# Altium PCB Bat_Indicator.PcbDoc
Units mil, origin at the board's own origin, x right, y up, seen from the top; angles counter-clockwise.
Board outline 1220.47 x 787.4 mil, 2 copper layers (Top Layer, Bottom Layer), stack 61.855 mil thick; 43 components, 34 nets, 166 pads, 4 vias.
Unrouted connection lines stored in the file: 56.
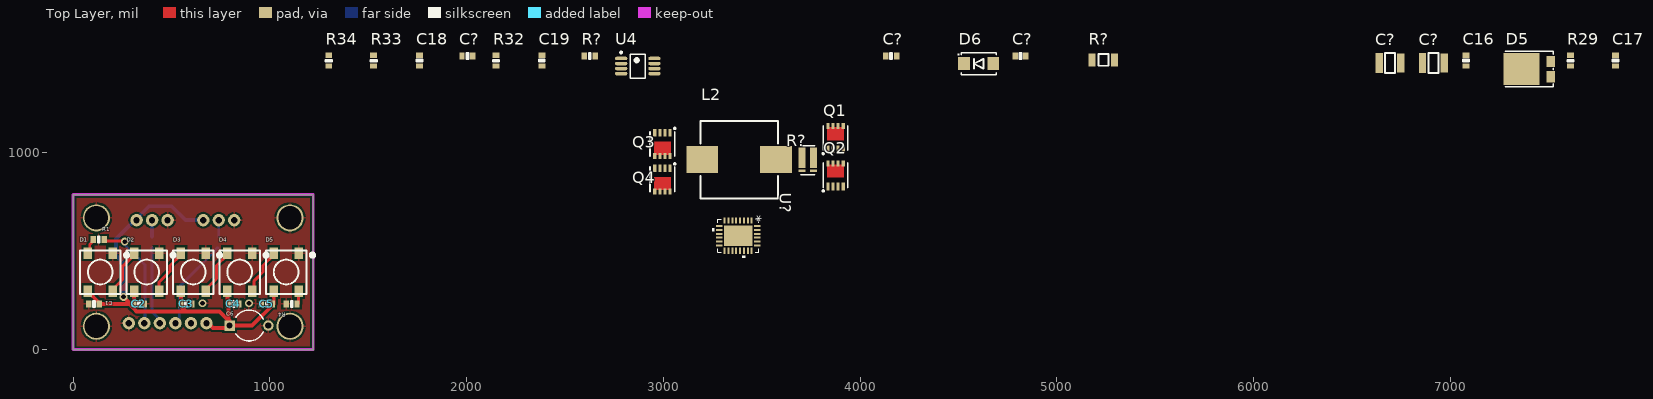
[diagram p0: Top Layer view]
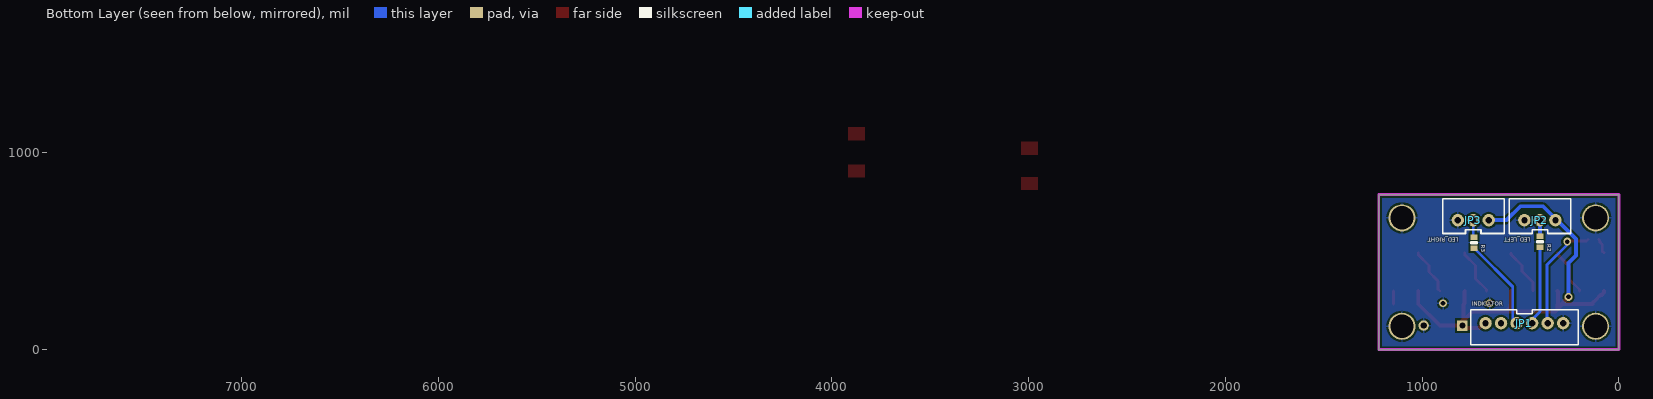
[diagram p1: Bottom Layer view, seen from below]

## Layer stack, top to bottom
Top Solder: solder mask 0.4, Solder Resist, Dk 3.5
Top Layer: signal copper 1.4
Dielectric 1: dielectric 59.0551, FR-4, Dk 4.8
Bottom Layer: signal copper 1.4
Bottom Solder: solder mask 0.4, Solder Resist, Dk 3.5

## Board outline
0,0 0,787.4 1220.47,787.4 1220.47,0

## Design rules (kind name [scope] priority, off if disabled: settings)
Clearance [All] p1: gap=6 ignorepadtopadclearanceinfootprint=FALSE
PolygonConnect [All] p1: connectstyle=Relief reliefconductorwidth=10 reliefentries=4 polygonreliefangle="90 Angle" airgapwidth=10
RoomDefinition Charging [InComponentClass('Charging')] p1: confinementstyle=ConfineIn formatcopy=TRUE lockcomponents=FALSE outline 1267.71,59.05 7988.17,59.05 7988.17,1625.98 1267.71,1625.98
RoomDefinition BAT_INDICATOR [InComponentClass('BAT_INDICATOR')] p2 off: confinementstyle=ConfineIn formatcopy=TRUE lockcomponents=FALSE outline 8113.54,7.99 11828.54,7.99 11828.54,677.99 8113.54,677.99
RoutingVias [All] p1: holewidth=24 width=40 viastyle="Through Hole" minholewidth=24 minwidth=40 maxholewidth=24 maxwidth=40
SolderMaskExpansion [All] p1: expansion=4 istentingtop=FALSE
Width [All] p1: maxlimit=20 minlimit=10 preferedwidth=15 minimp=50.000000 maximp=50.000000 favimp=50.000000
30 further rules are at their usual default settings.

## Classes and differential pairs
component class Charging: C16 C17 C18 C19 C? D5 D6 L2 Q1 Q2 Q3 R29 R32 R33 R34 R? U4 U?
component class BAT_INDICATOR: C1 C2 C3 C4 C5 C6 D1 D2 D3 D4 D5 JP1 JP2 JP3 R1 R2 R3 R4

## Components (designator, comment, footprint, x,y, rotation, side; value= is the part's Value field where it differs from the comment)
C1 "0.1uF 16V 0603" C0603[1608X92] 106.3,232.28 r0 top value=0.1uF
C2 "0.1uF 16V 0603" C0603[1608X92] 334.65,232.28 r180 top value=0.1uF
C3 "0.1uF 16V 0603" C0603[1608X92] 574.8,232.28 r180 top value=0.1uF
C4 "0.1uF 16V 0603" C0603[1608X92] 814.96,232.28 r180 top value=0.1uF
C5 "0.1uF 16V 0603" C0603[1608X92] 984.25,232.28 r0 top value=0.1uF
C6 "Cap2" CAPR5-4X5 893.7,122.05 r0 top value=100pF
C16 "10uF 16V 0603" C0603[1608X92] 7078.73,1468.5 r90 top value=10uF
C17 "10uF 16V 0603" C0603[1608X92] 7838.57,1468.5 r90 top value=10uF
C18 "0.1uF 6.3V 0603" C0603[1608X92] 1759.84,1468.5 r90 top value=0.1uF
C19 "0.1uF 6.3V 0603" C0603[1608X92] 2381.89,1468.5 r90 top value=0.1uF
C? "10uF 50V X5R +/-20% 1210" C1210[3225X150] 6692.9,1456.69 r0 top value="10 uF"
C? "0.47uF 50V 0603" C0603[1608X92] 4157.47,1492.12 r0 top value=0.47uF
C? "4.7uF 16V 0603" C0603[1608X92] 4814.95,1492.12 r0 top value=4.7uF
C? "10uF 50V X5R +/-20% 1210" C1210[3225X150] 6913.37,1456.69 r0 top value="10 uF"
C? "0.1uF 16V 0603" C0603[1608X92] 2003.93,1492.12 r0 top value=0.1uF
D1 "SK6812" SK6812 137.8,393.7 r270 top
D2 "SK6812" SK6812 374.02,393.7 r270 top
D3 "SK6812" SK6812 610.24,393.7 r270 top
D4 "SK6812" SK6812 846.46,393.7 r270 top
D5 "FSV10120V" TO-277 7401.56,1425.19 r0 top
D5 "SK6812" SK6812 1082.68,393.7 r270 top
D6 "SMAJ51A" DO-214AC 4602.35,1452.75 r0 top
JP1 "INDICATOR" JST-PH-6-PTH-VERT 480.06,133.86 r0 bottom
JP2 "LED_LEFT" JST-PH-3-PTH-VERT 401.57,657.48 r180 bottom
JP3 "LED_RIGHT" JST-PH-3-PTH-VERT 740.16,657.48 r180 bottom
L2 "SRP1038A-220M" SRP1038A 3385,965 r180 top value=22uH
Q1 "SIS862DN-T1-GE3" PowerPak-1212-8 3875,1075 r90 top
Q2 "SIS862DN-T1-GE3" PowerPak-1212-8 3875,885 r90 top
Q3 "SIS862DN-T1-GE3" PowerPak-1212-8 2995,865 r270 top
Q4 "SIS862DN-T1-GE3" PowerPak-1212-8 2995,1045 r270 top
R1 "150R 1% 0603" R0603[1608] 129.92,559.06 r180 top value=150R
R2 "150R 1% 0603" R0603[1608] 401.57,547.24 r270 bottom value=150R
R3 "150R 1% 0603" R0603[1608] 736.22,543.31 r270 bottom value=150R
R4 "10K 1% 0603" R0603[1608] 1110.24,232.28 r0 top value=10K
R29 "8K2 1% 0603" R0603[1608] 7610.22,1468.5 r90 top value=8K2
R32 "200K 1% 0603" R0603[1608] 2149.6,1468.5 r90 top value=200K
R33 "15K 1% 0603" R0603[1608] 1527.56,1468.5 r90 top value=15K
R34 "5K1 1% 0603" R0603[1608] 1299.21,1468.5 r90 top value=5K1
R? "0.016R 1% 1206" R1206[3216] 5236.21,1472.44 r0 top value=0.016R
R? "100K 1% 0603" R0603[1608] 2625.98,1492.12 r0 top value=100K
R? "KRL3216T4A-M-R007" KRL3216T4 3734.13,964.17 r180 top value=0.007R
U4 "MAX5215GUA+" MSOP-8 2870.07,1440.94 r0 top
U? "LT8390EUFDPBF" "QFN-28 UFD" 3380,578.45 r270 top

## Footprints (in the part's own frame and the unit in brackets; to place one, negate y for a bottom-side part, rotate by r counter-clockwise, add the part's x,y. Pads: shape width x height; smd on the part's side, far side on the other; paste and mask are expansions set on the pad)
C0603[1608X92] [mm] "Chip Capacitor, Body 1.6x0.8mm"
  rect 0.7x0.9 smd: 1(-0.7,0) 2(0.7,0)
  silkscreen extent -0.13,-0.38 0.13,0.38, body extent -0.8,-0.4 0.8,0.4, height 0.93
C1210[3225X150] [mm] "Chip Capacitor, Body 3.2x2.5mm"
  rect 0.95x2.6 smd: 1(-1.4,0)
  rect 0.95x2.5 smd: 2(1.4,0)
  silkscreen extent -0.64,-1.27 0.64,1.27, body extent -1.6,-1.25 1.6,1.25, height 1.51
CAPR5-4X5 [mm] "Capacitor; 2 Leads"
  rect 1.35x1.35 hole 0.8: 1(-2.5,0)
  round 1.35 hole 0.8: 2(2.5,0)
  silkscreen extent -1.69,-2 1.82,2
DO-214AC [mm] "DO-214AC, 2-Leads, Body 4.5x2.79mm, IPC Medium Density"
  rect 1.52x1.68 smd: 1(-1.88,0) 2(1.88,0)
  silkscreen extent -2.65,-1.4 2.25,1.4, body extent -2.8,-1.47 2.8,1.48, height 2.7
JST-PH-3-PTH-VERT [mil]
  round 63 hole 31.5: 1(-78.74,0) 2(0,0) 3(78.74,0)
  silkscreen extent -156,-68 157,110, body extent -155,-67 156,110, height 236
JST-PH-6-PTH-VERT [mil]
  round 63 hole 31.5: 1(-196.85,0) 2(-118.11,0) 3(-39.37,0) 4(39.63,0) 5(118.63,0) 6(197.37,0)
  silkscreen extent -274,-68 274,110, body extent -274,-67 274,110, height 236
KRL3216T4 [mm]
  rect 0.94x2.65 smd: 1(-0.74,-0.275) 2(0.74,-0.275)
  rect 0.94x0.35 smd: 3(-0.74,1.425) 4(0.74,1.425)
  silkscreen extent -0.9,-1.8 0.9,1.9
MSOP-8 [mm] "SOP, 8-Leads, Body 3x3mm, Pitch 0.65mm, IPC Medium Density"
  oval 1.6x0.45 smd: 1(-2.15,0.975) 2(-2.15,0.325) 3(-2.15,-0.325) 4(-2.15,-0.975) 5(2.15,-0.975) 6(2.15,-0.325) 7(2.15,0.325) 8(2.15,0.975)
  silkscreen extent -2.27,-1.55 0.95,1.87, body extent -2.5,-1.5 2.5,1.5, height 0.92
PowerPak-1212-8 [mm] "SOIC, 8-Leads, Body 3.30x3.30mm, Pitch 0.65mm, IPC Medium Density"
  rect 0.99x0.405 smd: 1(-1.435,-0.33) 1(-1.435,0.33) 1(-1.435,0.99) 2(-1.435,-0.99)
  rect 0.76x0.405 smd: 3(1.55,-0.99) 3(1.55,-0.33) 3(1.55,0.33) 3(1.55,0.99)
  Top Layer region: -0.3,-1.1 1.4,-1.1 1.4,1.1 -0.3,1.1
  silkscreen extent -2.1,-1.6 1.6,1.7, body extent -1.77,-1.8 1.77,1.75, height 1.04
"QFN-28 UFD" [mm]
  rect 0.805x0.25 smd: 1(-1.952,1.75) 2(-1.952,1.25) 3(-1.952,0.75) 4(-1.952,0.25) 5(-1.952,-0.25) 6(-1.952,-0.75) 7(-1.952,-1.25) 8(-1.952,-1.75) 15(1.952,-1.75) 16(1.952,-1.25) 17(1.952,-0.75) 18(1.952,-0.25) 19(1.952,0.25) 20(1.952,0.75) 21(1.952,1.25) 22(1.952,1.75)
  rect 0.25x0.805 smd: 9(-1.25,-2.452) 10(-0.75,-2.452) 11(-0.25,-2.452) 12(0.25,-2.452) 13(0.75,-2.452) 14(1.25,-2.452) 23(1.25,2.452) 24(0.75,2.452) 25(0.25,2.452) 26(-0.25,2.452) 27(-0.75,2.452) 28(-1.25,2.452)
  rect 2.65x3.65 smd paste+0 mask+0: 29(0,0)
  silkscreen extent -2.13,-3.36 2.86,2.63, body extent -2.05,-2.55 2.05,2.55, height 0.75
R0603[1608] [mm] "Chip Resistor, Body 1.55x0.85mm"
  rect 0.7x0.9 smd: 1(-0.7,0) 2(0.7,0)
  silkscreen extent -0.1,-0.4 0.1,0.4, body extent -0.77,-0.42 0.78,0.43, height 0.45
R1206[3216] [mm] "Chip Resistor, Body 3.2x1.6mm"
  rect 0.9x1.7 smd: 1(-1.45,0) 2(1.45,0)
  silkscreen extent -0.64,-0.76 0.64,0.76, body extent -1.6,-0.8 1.6,0.8, height 0.55
SK6812 [mm]
  rect 1.5x1.1 smd: 1(-2.45,1.6) 2(-2.45,-1.6) 3(2.45,-1.6) 4(2.45,1.6)
  silkscreen extent -2.8,-2.6 2.8,3.6, body extent -2.68,-2.47 2.67,2.48, height 1.5
SRP1038A [mm]
  rect 4.1x3.5 smd: 1(-4.75,0) 2(4.75,0)
  silkscreen extent -5,-5 5,5, body extent -5.2,-5 5.2,5, height 3.75
TO-277 [mm]
  rect 4.65x4.15 smd mask+0: 1(-1,0)
  rect 1.15x1.45 smd mask+0: 2(2.75,-0.985) 2(2.75,0.985)
  silkscreen extent -3.1,-2.3 3.1,2.3, body extent -3.35,-2.37 3.3,2.37, height 1.2

## Part data
C1 C2 C3 C4 C5 C?: library part CAP_0.1uF_16V_0603_10%, "0.1uF 16V 10% 0603 (1608 Metric)", Manufacturer=Murata, PartNumber=GCM188R71C104KA37D, TemperatureCoefficient=X7R, Tolerance=10%, Voltage=16V, Mounting Technology="Surface Mount", PackageDescription="0603 (1608 Metric)", PackageReference=0603
C6: "Capacitor", PackageDescription="Capacitor; 2 Leads", PackageReference=CAPR5-4X5, Published=23-Sep-2002, Publisher="Altium Limited"
C16 C17: library part CAP_10uF_16V_0603_10%, "10uF 16V 10% 0603 (1608 Metric)", Manufacturer=Murata, PartNumber=GRM188R61C106KAALD, TemperatureCoefficient=X5R, Tolerance=10%, Voltage=16V, Mounting Technology="Surface Mount", PackageDescription="0603 (1608 Metric)", PackageReference=0603
C18 C19: library part CAP_0.1uF_6.3V_0603_10%, "0.1uF 6.3V 10% 0603 (1608 Metric)", Manufacturer=Murata, PartNumber=GRM188R70J104KA01D, Tolerance=10%, Voltage=6.3V, Mounting Technology="Surface Mount", PackageDescription="0603 (1608 Metric)", PackageReference=0603
C? C?: library part CAP_10uF_50V_1210_20%, Manufacturer="Taiyo Yuden", PartNumber=UMK325BJ106MM-T, Tolerance=20%, Voltage=50V, Mounting Technology="Surface Mount", PackageDescription="1210 (3325 Metric)", PackageReference=1210
C?: library part CAP_0.47uF_50V_0603_10%, "0.47uF 50V 10% 0603 (1608 Metric)", Manufacturer=Murata, PartNumber=GRM188R61H474KA12D, TemperatureCoefficient=X5R, Tolerance=10%, Voltage=50V, Mounting Technology="Surface Mount", PackageDescription="0603 (1608 Metric)", PackageReference=0603
C?: library part CAP_4.7uF_16V_0603_10%, "4.7uF 16V 10% 0603 (1608 Metric)", Manufacturer=Murata, PartNumber=GRM188R61A475KE15D, TemperatureCoefficient=X5R, Tolerance=10%, Voltage=16V, Mounting Technology="Surface Mount", PackageDescription="0603 (1608 Metric)", PackageReference=0603
D1 D2 D3 D4 D5: "smart control circuit and a light emitting circuit in one of the controlled LED source"
D5: "Schottky Diodes & Rectifiers 10 Amp 120V Schottky Rectifier", Manufacturer="Fairchild Semiconductor", Mounting Technology="Surface Mount", PackageReference=TO-277-3, PartNumber=FSV10120V
D6: library part SMAJ51A-E3/61, Manufacturer=Vishay, Mounting Technology="Surface Mount", PackageDescription="DO-214AC, 2 Leads", PackageReference=DO-214AC, PartNumber=SMAJ51A-E3/61
JP1: library part JST_PH_6_VERT, Manufacturer="JST Sales America Inc.", PartNumber=B6B-PH-K-S(LF)(SN), Mounting Technology="Through Hole", PackageReference=JST-PH
JP2 JP3: library part JST_PH_3_VERT, Manufacturer="JST Sales America Inc.", PartNumber=B3B-PH-K-S(LF)(SN), Mounting Technology="Through Hole", PackageReference=JST-PH
L2: "22uH 20% 7A 1038", Current=7A, Manufacturer=Bourns, Mounting Technology="Surface Mount", PackageReference=SRP1038A, PartNumber=SRP1038A-220M
Q1 Q2 Q3 Q4: "N-Channel MOSFET", Manufacturer=Vishay, Mounting Technology="Surface Mount", PackageReference=PowerPAK-1212-8, PartNumber=SIS862DN-T1-GE3
R1 R2 R3: library part RES_150R_0603_1%, "150R 0.25W 1% 0603 (1005 Metric)", Manufacturer="Vishay / Dale", PartNumber=CRCW0603150RFKEAHP, Power=0.25W, Tolerance=1%, ComponentLink1Description=Datasheet, ComponentLink1URL=http://www.vishay.com/docs/20043/crcwhpe3.pdf, Mounting Technology="Surface Mount", PackageDescription="0603 (1608 Metric)", PackageReference=0603
R4: library part RES_10K_0603_1%, "10K 0.25W 1% 0603 (1005 Metric)", Manufacturer="Vishay / Dale", PartNumber=CRCW060310K0FKEAHP, Power=0.25W, Tolerance=1%, ComponentLink1Description=Datasheet, ComponentLink1URL=http://www.vishay.com/docs/20065/rcse3.pdf, Mounting Technology="Surface Mount", PackageDescription="0603 (1608 Metric)", PackageReference=0603
R29: library part RES_8K2_0603_1%, "8K2 0.25W 1% 0603 (1005 Metric)", Manufacturer=Vishay, PartNumber=CRCW06038K20FKEAHP, Power=0.25W, Tolerance=1%, ComponentLink1Description=Datasheet, ComponentLink1URL=http://www.vishay.com/docs/20043/crcwhpe3.pdf, Mounting Technology="Surface Mount", PackageDescription="0603 (1608 Metric)", PackageReference=0603
R32: library part RES_200K_0603_1%, "200K 0.25W 1% 0603 (1005 Metric)", Manufacturer="Rohm Semiconductor", PartNumber=ESR03EZPJ204, Power=0.25W, Tolerance=5%, ComponentLink1Description=Datasheet, ComponentLink1URL=http://www.vishay.com/docs/20043/crcwhpe3.pdf, Mounting Technology="Surface Mount", PackageDescription="0603 (1608 Metric)", PackageReference=0603
R33: library part RES_15K_0603_1%, "15K 0.25W 1% 0603 (1005 Metric)", Manufacturer="Vishay / Dale", PartNumber=CRCW060315K0FKEAHP, Power=0.25W, Tolerance=1%, ComponentLink1Description=Datasheet, ComponentLink1URL=http://www.vishay.com/docs/20043/crcwhpe3.pdf, Mounting Technology="Surface Mount", PackageDescription="0603 (1608 Metric)", PackageReference=0603
R34: library part RES_5K1_0603_1%, "5K1 0.25W 1% 0603 (1005 Metric)", Manufacturer="Vishay / Dale", PartNumber=CRCW06035K10FKEA, Power=0.25W, Tolerance=1%, ComponentLink1Description=Datasheet, ComponentLink1URL=http://www.vishay.com/docs/20035/dcrcwe3.pdf, Mounting Technology="Surface Mount", PackageDescription="0603 (1608 Metric)", PackageReference=0603
R?: library part RES_0.016R_1206_1%, "0.016R 1W 1% 1206 (3216 Metric)", Manufacturer=Panasonic, PartNumber=ERJ-8CWFR016V, Power=1W, Tolerance=1%, ComponentLink1Description=Datasheet, ComponentLink1URL=https://industrial.panasonic.com/cdbs/www-data/pdf/RDA0000/AOA0000C239.pdf, Mounting Technology="Surface Mount", PackageDescription="1206 (3216 Metric)", PackageReference=1206
R?: library part RES_100K_0603_1%, "100K 0.25W 1% 0603 (1005 Metric)", Manufacturer="Vishay / Dale", PartNumber=CRCW0603100KFKEAHP, Power=0.25W, Tolerance=1%, ComponentLink1Description=Datasheet, ComponentLink1URL=http://www.vishay.com/docs/20043/crcwhpe3.pdf, Mounting Technology="Surface Mount", PackageDescription="0603 (1608 Metric)", PackageReference=0603
R?: "Current Sense Resistor, 0.007R", Manufacturer=Susumu, Power=1W, Tolerance=1%, Mounting Technology="Surface Mount", PackageReference=1206, PartNumber=KRL3216T4A-M-R007
U4: "14 Bit Digital to Analog Converter", Manufacturer="Maxim Integrated", Mounting Technology="Surface Mount", PackageReference=MSOP-8, PartNumber=MAX5215GUA+
U?: "60V Synchronous 4-Switch Buck-Boost Controller", Manufacturer="Texas Instruments", PartNumber="Linear Technology", Mounting Technology="Surface Mount", PackageReference="QFN-28 UFD"

## Free pads (board coordinates)
  round 137.8 hole 118.11: 0(118.11,118.11) 0(118.11,669.29) 0(1102.36,118.11) 0(1102.36,669.29)

## Via types
v1: diameter 40, hole 24, Top Layer to Bottom Layer, 4 vias

## Nets (pads, with @x,y where several pads share a name; then routed paths per layer and width w, separated by ;. In a path a pad name is that pad's centre, name@x,y a point inside that pad or via, vN(x,y) a via of type N, cw(c..) or ccw(c..) an arc to the next point about the centre after c; other vN are vias at no path point)
5V: C1.2 C2.2 C3.2 C4.2 C5.2 C6.1 D1.3 D2.3 D3.3 D4.3 D5.3 JP1.6 JP2.3 JP3.3 | length 2523.1
  Top Layer w20: D1.3 74.8,289.37 86.46,277.72 93.09,277.72 112.52,258.28 112.52,257.56 133.86,236.22 C1.2 283.46,232.28 ; v1(255.91,267.72) 287.4,236.22 C2.2@299.21,224.41 ; C2.2@295.28,220.47 310.87,204.88 ; D2.3 309.06,295.28 309.06,234.25 C2.2 310.87,228.5 310.87,204.88 ; D3.3 C3.2 551.02,228.5 551.02,216.69 574.8,192.91 ; JP1.6 687.02,133.86 710.64,110.24 783.46,110.24 790.26,117.03 C6.1 ; D4.3 785.43,295.28 785.43,234.25 C4.2 790.26,229.43 790.26,160.53 ; C6.1@790.26,146.75 744.09,192.91 574.8,192.91 ; C6.1@795.28,146.75 C6.1 ; D5.3 1019.68,232.28 909.45,122.05 C6.1 ; 310.87,204.88 322.83,192.91 574.8,192.91
  Bottom Layer w20: v1(255.91,267.72) 255.91,440.95 218.5,478.35 218.5,561.02 385.83,728.35 500,728.35 570.87,657.48 JP3.3
BAT_INDC: D1.2 R1.2 | length 80.3
  Top Layer w15: D1.2 84.57,499.93 84.57,533.39 96.08,544.9 96.08,552.78 R1.2
BG2: Q4.2 U?.25
C+: C?.2@6748.02,1456.69 C?.2@6968.49,1456.69 Q1.3 U?.4
GND: C1.1 C2.1 C3.1 C4.1 C5.1 C6.2 C16.1 C17.1 C18.1 C19.2 D1.1 D2.1 D3.1 D4.1 D5.1@1145.67,490.16 D6.2 JP1.1 JP2.1 JP3.1 pad.0 Q2.1 Q4.1 R4.1 R34.1 U4.8 U?.29
  other v1: 657.48,234.99 893.7,234.99
ISN: D6.1 R32.2 R?.1@5179.12,1472.44 U?.12
ISP: Q3.3 R?.2@5293.3,1472.44 U?.11
LED_L: JP1.3 R2.2 | length 410.2
  Bottom Layer w15: R2.2 401.57,192.65 JP1.3@460.37,133.86
LED_R: JP1.4 R3.2 | length 465.7
  Bottom Layer w15: JP1.4@539.37,133.86 539.37,318.9 726,505.53 726,509.47 732.28,515.75 R3.2
LSN: R?.4 U?.3
LSP: R?.3 U?.2
NetC16_2: C16.2 C17.2 R29.1
NetC?_2: C?.2@4185.03,1492.12 U?.9
NetD1_4: D1.4 D2.2 | length 238.6
  Top Layer w15: D1.4 200.79,305.12 251.97,356.3 251.97,423.23 311.02,482.28 D2.2
NetD2_4: D2.4 D3.2 | length 238.6
  Top Layer w15: D2.4 437.01,342.52 492.13,397.64 492.13,427.17 547.24,482.28 D3.2
NetD3_4: D3.4 D4.2 | length 238.6
  Top Layer w15: D3.4 673.23,305.12 728.35,360.24 728.35,427.17 783.46,482.28 D4.2
NetD4_4: D4.4 D5.2@1019.69,490.16 | length 238.6
  Top Layer w15: D4.4 920.14,307.93 920.14,349.27 964.57,393.7 964.57,427.17 1019.69,482.28 D5.2@1019.69,490.16
NetD5_4: D5.4 R4.2 | length 65
  Top Layer w15: R4.2@1145.67,232.28 D5.4
NetJP1_2: JP1.2 R1.1 | length 574.8
  Top Layer w15: R1.1 165.36,551.18 259.84,551.18 v1(262.54,548.49)
  Bottom Layer w15: v1(262.54,548.49) 260.88,546.83 260.88,534.4 366.14,429.13 366.14,149.35 JP1.2@381.63,133.86
NetJP2_2: JP2.2 R2.1 | length 82.7
  Bottom Layer w20: R2.1 JP2.2
NetJP3_2: JP3.2 R3.1 | length 82.7
  Bottom Layer w15: R3.1@740.16,574.8 JP3.2
NetL2_1: L2.1 R?.2@3705,975
NetQ1_1: Q1.1 Q2.3 R?.1@3763.27,975 U?.28
NetQ1_2: Q1.2 U?.1
NetQ2_2: Q2.2 U?.26
NetR32_1: R32.1 R33.2 R34.2 U?.16
NetR33_1: R33.1 U4.6
NetR?_2: R?.2@2653.54,1492.12 U?.18
NetU4_3: U4.3
NetU4_4: U4.4
SGND: C?.1@1976.37,1492.12 C?.1@4129.91,1492.12 C?.1@4787.39,1492.12 R?.1@2598.42,1492.12 U?.7
SW2: L2.2 Q3.1 Q4.3 U?.23
TG2: Q3.2 U?.22
VCC: C18.2 C19.1 U4.1 U4.2 U4.5 U4.7
pads on no net: C?.1@6637.78,1456.69 C?.1@6858.25,1456.69 C?.2@2031.49,1492.12 C?.2@4842.51,1492.12 D5.1@7362.19,1425.19 D5.2@7509.83,1386.41 D5.2@7509.83,1463.97 JP1.5 R29.2 U?.5 U?.6 U?.8 U?.10 U?.13 U?.14 U?.15 U?.17 U?.19 U?.20 U?.21 U?.24 U?.27

## Polygon pours and split planes (outlines as drawn)
GND on Top Layer "Top Layer-GND" (solid, pour order 1): 0,787.4 1220.47,787.4 1220.47,0 0,0
GND on Bottom Layer "Bottom Layer-GND" (solid, remove dead copper, pour order 0): 0,787.4 1220.47,787.4 1220.47,0 0,0

## Keep-outs
Keep-Out Layer:
  the board outline again, w15

## Text inside footprints (layer, text, board x,y; h text height)
U?: Top Overlay "*" at 3448.74,683.65 h50 r270; Mechanical 7 "0.02in/0.5mm" at 3426.56,466.74 h25 r270; Mechanical 7 "0.016in/0.4mm" at 3606.39,588.83 h25 r270; Mechanical 7 "0.161in/4.1mm" at 3681.39,659.7 h25 r270; Mechanical 7 "0.197in/5mm" at 3367.5,997.65 h25 r270; Mechanical 7 "0.157in/4mm" at 3103.61,647.2 h25 r270; Mechanical 7 "0.104in/2.65mm" at 3186.57,665.95 h25 r270; Mechanical 7 "0.144in/3.65mm" at 3360,844.69 h25 r270; Mechanical 7 "-0.077in/-1.96mm" at 3548.43,678.45 h25 r270; Mechanical 7 "0.03in/0.75mm" at 3283.82,480.96 h25 r270; Mechanical 13 "*" at 3448.74,683.65 h50 r270